# Altium PCB CAN_SNIFFER.PcbDoc
Units mm, origin at the board's own origin, x right, y up, seen from the top; angles counter-clockwise.
Board outline 51.88 x 31.88 mm, 2 copper layers (Top Layer, Bottom Layer), stack 0.9 mm thick; 56 components, 61 nets, 266 pads, 172 vias.
Unrouted connection lines stored in the file: 1.
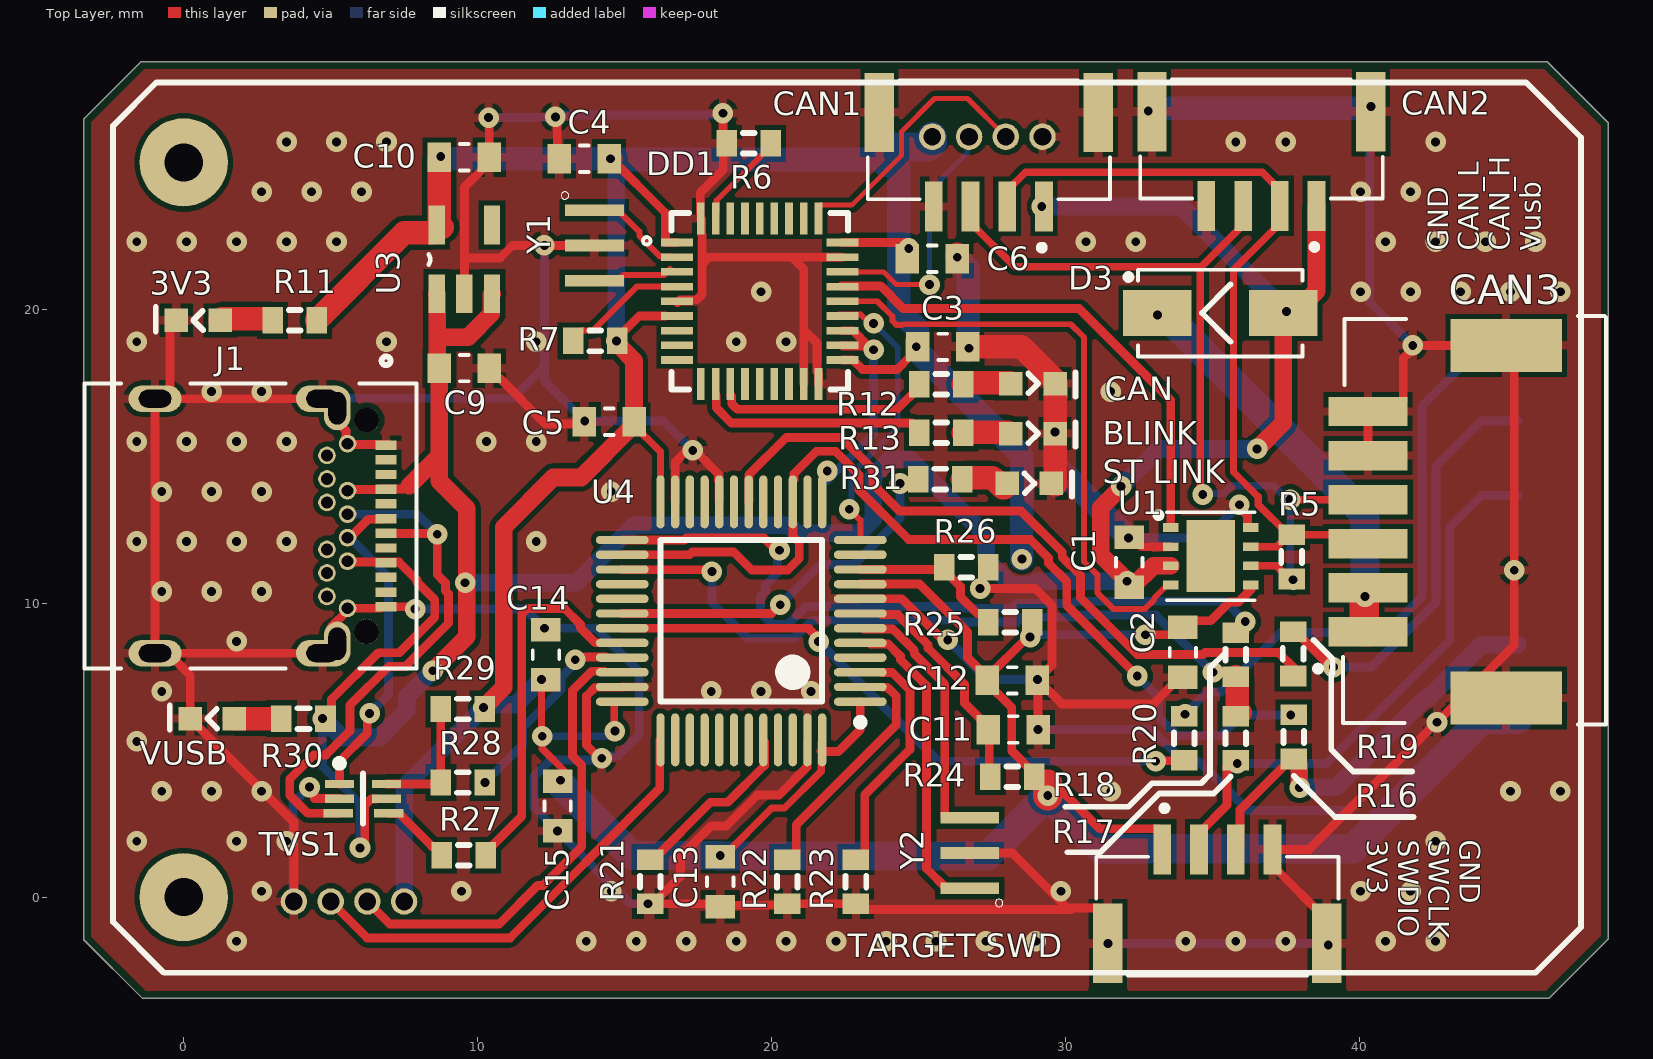
[diagram p0: Top Layer view]
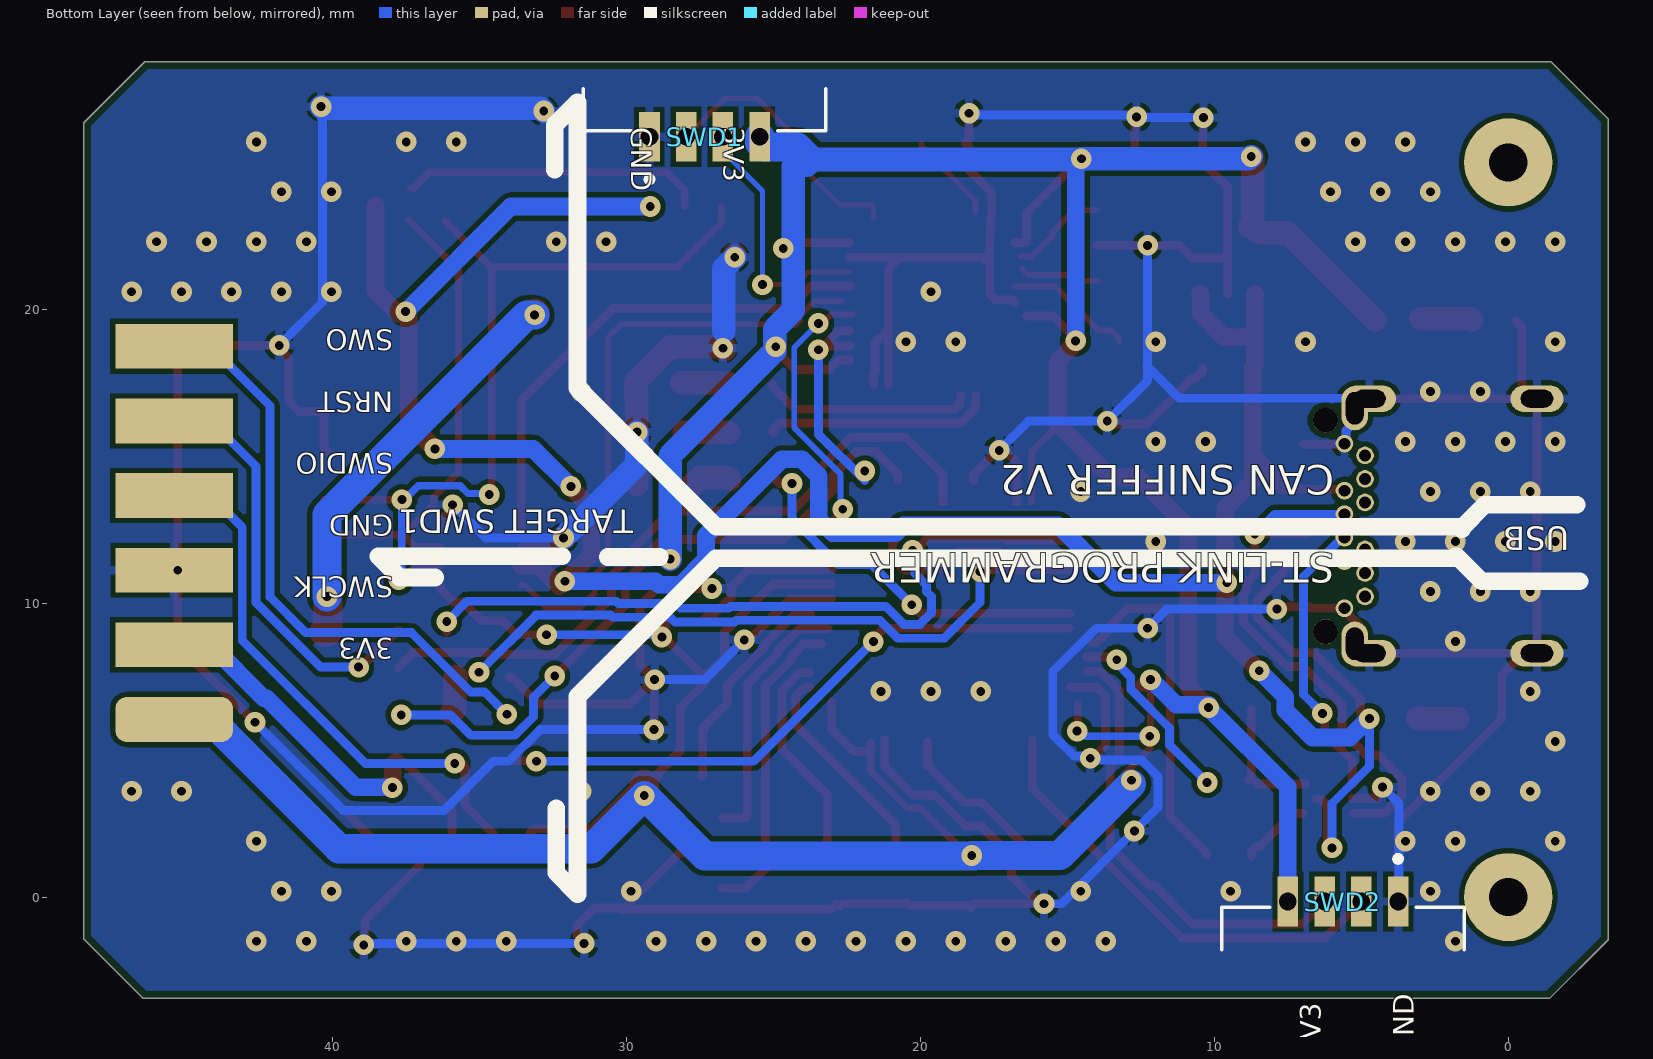
[diagram p1: Bottom Layer view, seen from below]
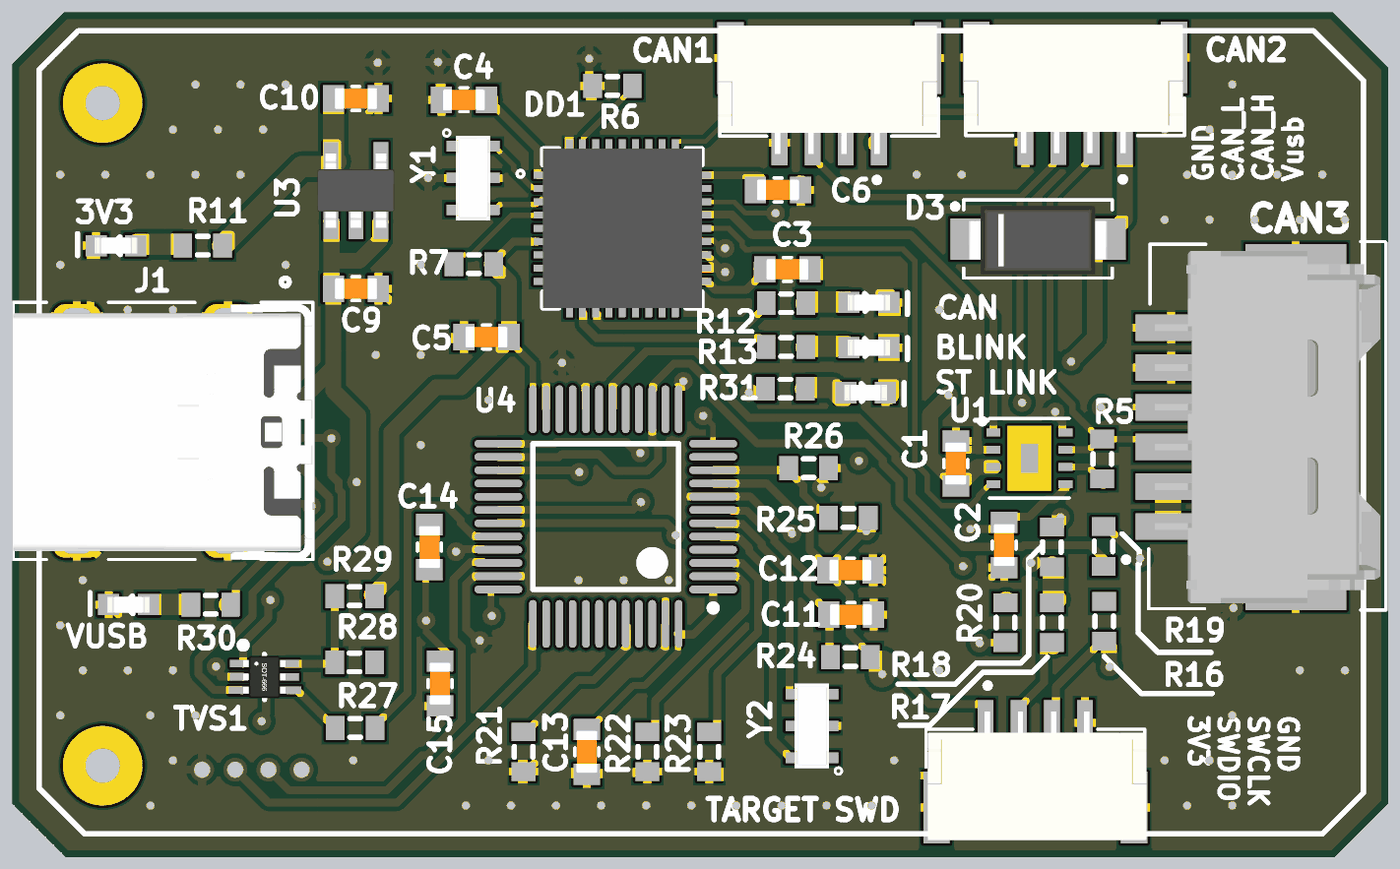
[diagram p2: 3D render of the assembled board from above, using the file's embedded part models]

## Layer stack, top to bottom
Top Solder: solder mask 0.0102, Solder Resist, Dk 3.5
Top Layer: signal copper 0.05
Dielectric 1: dielectric 0.8, FR-4, Dk 4.8
Bottom Layer: signal copper 0.05
Bottom Solder: solder mask 0.0102, Solder Resist, Dk 3.5

## Board outline
-3.4,-1.45 -3.4,26.475 -1.45,28.425 46.4,28.425 48.475,26.35 48.475,-1.425 46.45,-3.45 -1.4,-3.45

## Design rules (kind name [scope] priority, off if disabled: settings)
BoardOutlineClearance [All] p1: gap=0.25 ignorepadtopadclearanceinfootprint=FALSE
Clearance [All] p1: gap=0.17 ignorepadtopadclearanceinfootprint=FALSE
ComponentClearance [All] p1: gap=0.254 collisioncheckmode=3 verticalgap=2540 showdistances=FALSE
FanoutControl Fanout_SOIC [IsSOIC] p3: bgadir=Out bgaviamode=Closest fanoutstyle=Auto fanoutdirection=Alternating viagrid=0.025 // Fanout_SOIC (Default Rule)
FanoutControl Fanout_Small [(CompPinCount < 5)] p4: bgadir=Out bgaviamode=Closest fanoutstyle=Auto fanoutdirection=OutThenIn viagrid=0.025 // Fanout_Small (Default Rule)
FanoutControl Fanout_Default [All] p5: bgadir=In bgaviamode=Closest fanoutstyle=Auto fanoutdirection=Alternating viagrid=0.025 // Fanout_Default (Default Rule)
HoleSize [All] p1: absolutevalues=TRUE maxlimit=4.5 minlimit=0.3 maxpercent=80.000 minpercent=20.000
HoleToHoleClearance [All] p1: gap=0.4 allowstackedmicrovias=TRUE
MinimumSolderMaskSliver [All] p1: minsoldermaskwidth=0.15
PlaneClearance [All] p1: clearance=0.2
PlaneConnect [All] p1: planeconnectstyle=Relief reliefexpansion=0.5 reliefentries=4 reliefconductorwidth=0.2 reliefairgap=0.25
PolygonConnect PolygonConnect_1 [InNet('GND') vs IsStitchingVia and InNet('GND')] p1: connectstyle=Direct reliefconductorwidth=0.254 reliefentries=4 polygonreliefangle="90 Angle" airgapwidth=0.254
PolygonConnect [All] p2: connectstyle=Relief reliefconductorwidth=0.3 reliefentries=4 polygonreliefangle="90 Angle" airgapwidth=0.16
RoutingCorners [All] p1: cornerstyle=45-Degree minsetback=2.5 maxsetback=2.5
RoutingPriority [All] p1 off: routingpriority=0
RoutingVias [All] p1: holewidth=0.3 width=0.7 viastyle="Through Hole" minholewidth=0.3 minwidth=0.7 maxholewidth=0.8 maxwidth=1.2
SilkToSilkClearance [All] p1: silktosilkclearance=0
SilkToSolderMaskClearance [IsPad] p1: minsilkscreentomaskgap=0 clearancetoexposedcopper=TRUE
SolderMaskExpansion [All] p1: expansion=0.1 istentingtop=FALSE
Width [All] p1: maxlimit=5 minlimit=0.17 preferedwidth=0.3
17 further rules are at their usual default settings.

## Classes and differential pairs
component class STLINKv2DIY: C11 C12 C13 C14 C15 iC iD R16 R17 R18 R19 R20 R21 R22 R23 R24 R25 R26 R27 R28 R29 R30 R31 Rx "ST LINK" SWD2 "TARGET SWD" "TARGET SWD1" TVS1 Tx U4 VUSB Y2
component class CAN_SNIFFER: 3V3 BLINK C1 C2 C3 C4 C5 C6 C9 C10 CAN CAN1 CAN2 CAN3 D3 DD1 J1 R5 R6 R7 R11 R12 R13 SWD1 U1 U3 Y1

## Components (designator, comment, footprint, x,y, rotation, side; value= is the part's Value field where it differs from the comment)
3V3 "0603-LED-RED" *LEDM1608X80_LTE-C1906R-14(Primary) 0.5,19.625 r0 top value=RED
BLINK "0603-LED-GREEN" *LEDM1608X80_LTE-C1906R-14(Primary) 28.9,15.775 r180 top value=GREEN
C1 "GX035C104MAT2-500" *CAPC1608X90 32.175,11.4 r90 top value=0.1u
C2 "GX035C104MAT2-500" *CAPC1608X90 34,8.325 r270 top value=0.1u
C3 "GX035C104MAT2-500" *CAPC1608X90 25.825,18.725 r0 top value=0.1u
C4 "GX035C104MAT2-500" *CAPC1608X90 13.625,25.125 r180 top value=0.1u
C5 "GX035C104MAT2-500" *CAPC1608X90 14.475,16.175 r180 top value=0.1u
C6 "GX035C104MAT2-500" *CAPC1608X90 25.475,21.725 r0 top value=0.1u
C9 "GX035C104MAT2-500" *CAPC1608X90 9.55,18 r0 top value=0.1u
C10 "GX035C104MAT2-500" *CAPC1608X90 9.55,25.175 r0 top value=0.1u
C11 "GX035C104MAT2-500" *CAPC1608X90 28.225,5.7 r0 top value=0.1u
C12 "GX035C104MAT2-500" *CAPC1608X90 28.2,7.375 r0 top value=0.1u
C13 "GX035C104MAT2-500" *CAPC1608X90 18.258,0.525 r270 top value=0.1u
C14 "GX035C104MAT2-500" *CAPC1608X90 12.325,8.25 r90 top value=0.1u
C15 "GX035C104MAT2-500" *CAPC1608X90 12.725,3.1 r270 top value=0.1u
CAN "0603-LED-BLUE" *LEDM1608X80_LTE-C1906R-14(Primary) 28.9,17.475 r180 top value=BLUE
CAN1 "SM04B-GHS-TB(LF)(SN)-" JST_SM04B-GHS-TB(LF)(SN)- 27.4,25.775 r180 top
CAN2 "SM04B-GHS-TB(LF)(SN)-" JST_SM04B-GHS-TB(LF)(SN)- 36.675,25.8 r180 top
CAN3 "502585-0670" MOLEX_502585-0670 40.5,12.775 r90 top
D3 "SS16" *DIOM5227X250N_SS16(Primary) 35.275,19.875 r0 top
DD1 "STM32F103T8" *QFN50P600X600X100-37N 19.6,20.275 r0 top
J1 "UJ31-CH-31N-SMT-TR" CUI_UJ31-CH-31N-SMT-TR 6.885,15.38 r270 top
R5 "RC0603FR-07120RL" J1-0603 37.7,11.575 r90 top value=120
R6 "RC0603FR-0710KL" J1-0603 19.225,25.65 r0 top value=10k
R7 "RC0603FR-0710KL" J1-0603 14,18.925 r180 top value=10k
R11 "RC0603FR-101KL" J1-0603 3.775,19.625 r180 top value=1k
R12 "RC0603FR-101KL" J1-0603 25.775,17.45 r0 top value=1k
R13 "RC0603FR-101KL" J1-0603 25.775,15.8 r0 top value=1k
R16 "RC0603FR-0722RL" J1-0603 37.775,5.45 r90 top value=22
R17 "RC0603FR-0722RL" J1-0603 35.8,5.4 r90 top value=22
R18 "RC0603FR-07100RL" J1-0603 35.8,8.25 r90 top value=100
R19 "RC0603FR-0722RL" J1-0603 37.75,8.275 r270 top value=22
R20 "RC0603FR-0722RL" J1-0603 34.05,5.4 r270 top value=22
R21 "RC0603FR-0710KL" J1-0603 15.875,0.525 r270 top value=10k
R22 "RC0603FR-0710KL" J1-0603 20.542,0.525 r270 top value=10k
R23 "RC0603FR-0710KL" J1-0603 22.875,0.525 r270 top value=10k
R24 "RC0603FR-0710KL" J1-0603 28.2,4.1 r0 top value=10k
R25 "RC0603FR-0710KL" J1-0603 28.125,9.35 r0 top value=10k
R26 "RC0603FR-0710KL" J1-0603 26.625,11.225 r180 top value=10k
R27 "RC0603FR-0722RL" J1-0603 9.525,1.425 r0 top value=22
R28 "RC0603FR-0722RL" J1-0603 9.5,3.9 r0 top value=22
R29 "RC0603FR-071K5L" J1-0603 9.5,6.4 r0 top value=1.5k
R30 "RC0603FR-101KL" J1-0603 4.075,6.075 r180 top value=1k
R31 "RC0603FR-101KL" J1-0603 25.75,14.225 r0 top value=1k
"ST LINK" "0603-LED-BLUE" *LEDM1608X80_LTE-C1906R-14(Primary) 28.775,14.075 r180 top value=BLUE
SWD1 "SM04B-GHS-TB(LF)(SN)-" JST_BM04B-GHS-holes 27.35,29.225 r0 bottom
SWD2 "SM04B-GHS-TB(LF)(SN)-" JST_BM04B-GHS-holes 5.625,-3.5 r180 bottom
"TARGET SWD" "SM04B-GHS-TB(LF)(SN)-" JST_SM04B-GHS-TB(LF)(SN)- 35.175,-0.65 r0 top
"TARGET SWD1" "PLS-6" "HDR Side 6 pin" 45.4,8.585 r90 bottom
TVS1 "USBLC6-2P6" SOT23127P600-8N 6.1,3.35 r0 top
U1 "TJA1042TK/3" SOT782-1 34.95,11.6 r270 top
U3 "SPX3819M5-L-3-3/TR" *SOT95P280X145-5N 9.55,21.7 r90 top value=3V3
U4 "STM32F103CBT6" STM-LQFP48_N 18.975,9.4 r180 top
VUSB "0603-LED-ORANGE" *LEDM1608X80_LTE-C1906R-14(Primary) 0.975,6.075 r0 top value=ORANGE
Y1 "CSTCE8M00G55-R0" *OSC_CSTCE8M00G55-R0 13.975,22.175 r270 top
Y2 "CSTCE8M00G55-R0" *OSC_CSTCE8M00G55-R0 26.75,1.5 r90 top

## Footprints (in the part's own frame and the unit in brackets; to place one, negate y for a bottom-side part, rotate by r counter-clockwise, add the part's x,y. Pads: shape width x height; smd on the part's side, far side on the other; paste and mask are expansions set on the pad)
*CAPC1608X90 [mm]
  rect 0.8x1 smd: 1(-0.85,0) 2(0.85,0)
  silkscreen extent -0.15,-0.45 0.15,0.45, body extent -0.8,-0.4 0.8,0.41, height 0.88
*DIOM5227X250N_SS16(Primary) [mm]
  rect 2.33x1.56 smd: A(2.14,0) C(-2.14,0)
  silkscreen extent -3.22,-1.48 2.8,1.48, body extent -2.61,-1.35 2.61,1.25, height 2.2
*LEDM1608X80_LTE-C1906R-14(Primary) [mm]
  rect 0.8x0.8 smd: A(0.75,0) C(-0.75,0)
  silkscreen extent -1.45,-0.38 0.16,0.45, body extent -0.8,-0.3 0.8,0.3, height 1.15
*OSC_CSTCE8M00G55-R0 [mm]
  rect 0.4x2 smd: 1(-1.2,0) 2(0,0) 3(1.2,0)
  silkscreen extent -1.83,-1.13 -1.57,-0.87, body extent -1.6,-0.65 1.6,0.65, height 1
*QFN50P600X600X100-37N [mm]
  rect 1.08x0.26 smd: 1(-2.815,2) 2(-2.815,1.5) 3(-2.815,1) 4(-2.815,0.5) 5(-2.815,0) 6(-2.815,-0.5) 7(-2.815,-1) 8(-2.815,-1.5) 9(-2.815,-2) 19(2.815,-2) 20(2.815,-1.5) 21(2.815,-1) 22(2.815,-0.5) 23(2.815,0) 24(2.815,0.5) 25(2.815,1) 26(2.815,1.5) 27(2.815,2)
  rect 0.26x1.08 smd: 10(-2,-2.815) 11(-1.5,-2.815) 12(-1,-2.815) 13(-0.5,-2.815) 14(0,-2.815) 15(0.5,-2.815) 16(1,-2.815) 17(1.5,-2.815) 18(2,-2.815) 28(2,2.815) 29(1.5,2.815) 30(1,2.815) 31(0.5,2.815) 32(0,2.815) 33(-0.5,2.815) 34(-1,2.815) 35(-1.5,2.815) 36(-2,2.815)
  silkscreen extent -3.97,-3 3,3, body extent -3,-3 3,3, height 1
*SOT95P280X145-5N [mil]
  rect 52x22 smd: 1(-46,37) 2(-46,0) 3(-46,-37) 4(46,-37) 5(46,37)
  silkscreen extent -7,46 7,48, body extent -55,-57 55,57, height 57
CUI_UJ31-CH-31N-SMT-TR [mm]
  rect 0.32x0.7 smd: A1(0,0) A2(0.5,0) A3(1,0) A4(1.5,0) A5(2,0) A6(2.5,0) A7(3,0) A8(3.5,0) A9(4,0) A10(4.5,0) A11(5,0) A12(5.5,0)
  round 0.6 hole 0.4: B1(5.55,-1.31) B2(5.15,-2.01) B3(4.35,-2.01) B4(3.95,-1.31) B5(3.55,-2.01) B6(3.15,-1.31) B7(2.35,-1.31) B8(1.95,-2.01) B9(1.55,-1.31) B10(1.15,-2.01) B11(0.35,-2.01) B12(-0.05,-1.31)
  oval 1.5x0.9 hole 0.6 slot 1.1 at 0 deg: SH1(-1.255,-1.66) SH2(6.755,-1.66)
  oval 0.9x1.8 hole 0.6 slot 1.1 at 90 deg: SH3(-1.58,-2.16) SH4(7.08,-2.16) SH5(-1.58,-7.86) SH6(7.08,-7.86)
  round 0.85 hole 0.85 unplated: ""(-0.85,-0.66) ""(6.35,-0.66)
  silkscreen extent -3.02,-10.26 7.6,1.04, body extent -2.06,-10.26 7.64,1.04, height 3.17
"HDR Side 6 pin" [mm]
  rrect50% 1.524x4 smd: 1(-2.54,0)
  rect 1.524x4 smd: 2(0,0) 3(2.54,0) 4(5.08,0) 5(7.62,0) 6(10.16,0)
J1-0603 [mm] "Chip Resistor, Body 1.6x0.8mm, IPC High Density"
  rect 0.7x0.9 smd: 1(-0.75,0) 2(0.75,0)
  silkscreen extent -0.2,-0.35 0.2,0.35, body extent -0.85,-0.48 0.85,0.48, height 0.9
JST_BM04B-GHS-holes [mm]
  rect 0.7x1.7 / inner rect 0.6x1.7 / far side round 0.9 hole 0.6 mask+0.1: 1(1.875,3.35) 2(0.625,3.35) 3(-0.625,3.35) 4(-1.875,3.35)
  silkscreen extent -4.13,1.72 4.13,4.9
JST_SM04B-GHS-TB(LF)(SN)- [mm]
  rect 0.6x1.7 smd: 1(-1.875,2.275) 2(-0.625,2.275) 3(0.625,2.275) 4(1.875,2.275)
  rect 1x2.7 smd: SH1(-3.725,-0.925) SH2(3.725,-0.925)
  silkscreen extent -4.13,-2.02 4.13,3.77, body extent -4.06,-2.16 4.19,2.69, height 4.35
MOLEX_502585-0670 [mm]
  rect 1x2.7 smd: 1(-3.75,0.2) 2(-2.25,0.2) 3(-0.75,0.2) 4(0.75,0.2) 5(2.25,0.2) 6(3.75,0.2)
  rect 1.8x3.8 smd: P1(-6,-4.5) P2(6,-4.5)
  silkscreen extent -6.9,-7.9 7,2, body extent -6.65,-7.68 6.65,0.82, height 6.41
SOT782-1 [mm]
  rect 0.3x0.525 smd: 1(-0.975,-1.362) 2(-0.325,-1.362) 3(0.325,-1.362) 4(0.975,-1.362) 5(0.975,1.363) 6(0.325,1.363) 7(-0.325,1.363) 8(-0.975,1.363)
  rect 2.45x1.65 smd paste-2: P$9(0,0)
  silkscreen extent -1.5,-1.88 1.5,1.5, body extent -1.52,-1.52 1.52,1.52, height 0.85
SOT23127P600-8N [mm]
  rect 1x0.284 smd: 1(-0.8,0.5) 2(-0.8,0) 3(-0.843,-0.502) 4(0.884,-0.502) 5(0.8,0) 6(0.8,0.5)
  silkscreen extent -0.92,-0.85 0,1.32, body extent -0.8,-0.8 0.8,0.8, height 0.6
STM-LQFP48_N [mm] "QFP, 48-Leads, Body 7x7mm, Pitch 0.5mm, IPC Medium Density"
  oval 1.8x0.284 smd: 1(-4.05,2.75) 2(-4.05,2.25) 3(-4.05,1.75) 4(-4.05,1.25) 5(-4.05,0.75) 6(-4.05,0.25) 7(-4.05,-0.25) 8(-4.05,-0.75) 9(-4.05,-1.25) 10(-4.05,-1.75) 11(-4.05,-2.25) 12(-4.05,-2.75) 25(4.05,-2.75) 26(4.05,-2.25) 27(4.05,-1.75) 28(4.05,-1.25) 29(4.05,-0.75) 30(4.05,-0.25) 31(4.05,0.25) 32(4.05,0.75) 33(4.05,1.25) 34(4.05,1.75) 35(4.05,2.25) 36(4.05,2.75)
  oval 0.284x1.8 smd: 13(-2.75,-4.05) 14(-2.25,-4.05) 15(-1.75,-4.05) 16(-1.25,-4.05) 17(-0.75,-4.05) 18(-0.25,-4.05) 19(0.25,-4.05) 20(0.75,-4.05) 21(1.25,-4.05) 22(1.75,-4.05) 23(2.25,-4.05) 24(2.75,-4.05) 37(2.75,4.05) 38(2.25,4.05) 39(1.75,4.05) 40(1.25,4.05) 41(0.75,4.05) 42(0.25,4.05) 43(-0.25,4.05) 44(-0.75,4.05) 45(-1.25,4.05) 46(-1.75,4.05) 47(-2.25,4.05) 48(-2.75,4.05)
  silkscreen extent -4.18,-2.75 2.75,3.57, body extent -3.5,-3.5 3.5,3.5, height 1.6

## Part data
3V3: "Red 620nm LED Indication - Discrete 2.2V 0603 (1608 Metric)", Package="0603 Lite-On", MP=LTST-C194KRKT, SnapEDA_Link=https://www.snapeda.com/parts/LTE-C1906R-14/Lite-On%20Inc./view-part/?ref=snap, Type=SMD
BLINK: "Green 571nm LED Indication - Discrete 2V 0603 (1608 Metric)", Package="0603 Lite-On", MP=LTST-C191KGKT, SnapEDA_Link=https://www.snapeda.com/parts/LTST-C190KGKT/Lite-On%20Inc./view-part/?ref=search&t=0603%20LED%20GREEN, Type=SMD
C1 C2 C3 C4 C5 C6 C9 C10 C11 C12 C13 C14 C15: "Cap Thin Film 0.1uf 50v 0603", Package="0603 AVX", MF=AVX, MP=CL10B104JB8NNNC, Pacage Metric=1608, SnapEDA_Link=https://www.snapeda.com/parts/GX035C104MAT2-500/AVX/view-part/?ref=snap, Type=SMD
CAN "ST LINK": "LED IrLED Chip LED 2-Pin SMD T/R", Package="0603 Lite-On", MP=LTST-S270TBKT, SnapEDA_Link=https://www.snapeda.com/parts/LTE-C1906R-14/Lite-On%20Inc./view-part/?ref=snap, Type=SMD
CAN1 CAN2 "TARGET SWD": "Connector Header Surface Mount, Right Angle 4 position 0.049 _1.25mm_", Package=None, ChipDip_Link=https://www.chipdip.ru/product/sm04b-ghs-tb-lf-sn-gh-1.25mm-header-side-ent, HelpURL=http://www.farnell.com/datasheets/2082975.pdf, MF="JST Sales", MP=SM04B-GHS-TB(LF)(SN), SnapEDA_Link=https://www.snapeda.com/parts/SM04B-GHS-TB%28LF%29%28SN%29-/JST%20Sales%20America%20Inc./view-part/2759740/?ref=snap, System=Connector
CAN3: "1.50mm Pitch, CLIK-Mate PCB Receptacle, Single Row, Surface Mount, Right-Angle, Tin Plating, Positive Lock, 6 Circuits, Natural", Package=None, MF=Molex, MP=502585-0670, SnapEDA_Link=https://www.snapeda.com/parts/502494-0670/Molex/view-part/?ref=snap, System=Connector, Type=SMD
D3: "Diode Schottky 60V 1A Surface Mount SMA", Package=SMA-2, ChipDip_Link=https://www.chipdip.ru/product/ss16, Instructions=DNP, MP=SS16, SnapEDA_Link=https://www.snapeda.com/parts/SS16/ON%20Semiconductor/view-part/?ref=search&t=ss16, Type=SMD
DD1: "STM32F103T8U6, Микроконтроллер 32BIT ARM 64K FLASH [VFQFPN-36]", Package=VFQFPN-36, ChipDip_Link=https://www.chipdip.ru/product/stm32f103t8u6-2, HelpURL=http://www.st.com/stonline/products/literature/ds/13587.pdf, MF=STM, MP=STM32F103T8U6, SnapEDA_Link=https://www.snapeda.com/parts/STM32F103T8U6TR/STMicroelectronics/view-part/?ref=search&t=STM32F103T8U6, Type=SMD
J1: "Type C, USB 3.1 Gen 2, 5 A, Right Angle, Surface Mount _SMT_, USB Receptacle", Package=None, ChipDip_Link=https://www.chipdip.ru/product1/8002862225, HelpURL=https://www.chipdip.ru/product1/8002862225, MF="CUI Devices", MP=UJ31-CH-31N-SMT-TR, SnapEDA_Link=https://www.snapeda.com/parts/UJ31-CH-31N-SMT-TR/CUI%20Devices/view-part/2776725/?ref=snap, System=Connector, Type=SMT
R5: "120 Ohms 1 0.1 W 1 10 W Chip Resistor 0603 1608 Metric Thick Film", Package=R0603, ChipDip_Link=https://www.chipdip.ru/product0/9000079618, HelpURL=https://www.chipdip.ru/product0/9000079618, MF="Yageo or NXP", MP=RC0603FR-07120RL, Pacage Metric=1608, SnapEDA_Link=https://www.snapeda.com/parts/RC0603FR-07120RL/Yageo/view-part/?ref=search&t=RC0603FR-07120RL, Type=SMD
R6 R7 R21 R22 R23 R24 R25 R26: "10 kOhms 1 0.1 W 1 10 W Chip Resistor 0603 1608 Metric Thick Film", Package=R0603, ChipDip_Link=https://www.chipdip.ru/product0/9000079736, HelpURL=https://www.chipdip.ru/product0/9000079736, MF="Yageo or NXP", MP="10K 1% 0603", Pacage Metric=1608, SnapEDA_Link=https://www.snapeda.com/parts/RC0603FR-0710KL/Yageo/view-part/?ref=dk&t=RC0603FR-0710KL&con_ref=None, Type=SMD
R11 R12 R13 R30 R31: "1 kOhms ±1% 0.1W, 1/10W Chip Resistor 0603 (1608 Metric) Moisture Resistant Thick Film", Package=R0603, MF="Yageo or NXP", MP=RC0603FR-101KL, Pacage Metric=1608, SnapEDA_Link=https://www.snapeda.com/parts/RC0603FR-101KL/Yageo/view-part/?ref=search&t=RC0603FR-07%201k, Type=SMD
R16 R17 R19 R20 R27 R28: "22 Ohms ±1% 0.1W, 1/10W Chip Resistor 0603 (1608 Metric) Moisture Resistant Thick Film", Package=R0603, MF="Yageo or NXP", MP=RC0603FR-0722RL, Pacage Metric=1608, SnapEDA_Link=https://www.snapeda.com/parts/RC0603FR-0722RL/Mepco%20Philips/view-part/?ref=search&t=RC0603FR-0722RL, Type=SMD
R18: "100 Ohms ±1% 0.1W, 1/10W Chip Resistor 0603 (1608 Metric) Thick Film", Package=R0603, MF="Yageo or NXP", MP=RC0603FR-07100RL, Pacage Metric=1608, SnapEDA_Link=https://www.snapeda.com/parts/RC0603FR-07100RL/Yageo/view-part/?ref=search&t=RC0603FR-07100RL, Type=SMD
R29: "1.5 kOhms ±1% 0.1W, 1/10W Chip Resistor 0603 (1608 Metric) Thick Film", Package=R0603, MF="Yageo or NXP", MP=RC0603FR-071K5L, Pacage Metric=1608, SnapEDA_Link=https://www.snapeda.com/parts/RC0603FR-071K5L/Yageo/view-part/?ref=search&t=RC0603FR-07%201k, Type=SMD
SWD1 SWD2: library part "SWD SM04B-GHS-TB(LF)(SN)-", "Conn Shrouded Header HDR 4 POS 1.25mm Solder ST SMD Reel", Package=None, Instructions=DNP, MF="JST Sales", MP=SM04B-GHS-TB(LF)(SN), SnapEDA_Link=https://www.snapeda.com/parts/BM04B-GHS-TBT%28LF%29%28SN%29%28N%29/JST%20Sales%20America%20Inc./view-part/?ref=snap, System=Connector, Type=SMD
"TARGET SWD1": "PLS-6 (DS1021-1x6), Вилка штыревая 2.54мм 1x6 прямая тип1", ChipDip_Link=https://www.chipdip.ru/product/pls-6, Instructions=DNP, MP=PLS-6, System=Connector, Type=SMD
TVS1: "17V Clamp 5A (8/20µs) Ipp Tvs Diode Surface Mount SOT-666", Package=SOT-666, ChipDip_Link=https://www.chipdip.ru/product/usblc6-2p6-2, HelpURL=https://static.chipdip.ru/lib/093/DOC001093117.pdf, MF=STM, MP=USBLC6-2P6, SnapEDA_Link=https://www.snapeda.com/parts/USBLC6-2P6/STMicroelectronics/view-part/?ref=search&t=USBLC6-2P6, Type=SMD
U1: library part TJA1042, "1/1 Transceiver Half CANbus 8-SO", Package="VDFN-8 NXP USA", ChipDip_Link=https://www.chipdip.ru/product1/8002840332, HelpURL=https://static.chipdip.ru/lib/583/DOC001583059.pdf, MF="NXP USA", MP=TJA1042TK/3, SnapEDA_Link=https://www.snapeda.com/parts/TJA1042/NXP%20USA%20Inc./view-part/900919/?ref=snap, Type=SMD
U3: "Low Dropout Voltage Regulator, Adjustable 0.5A, В±1%, 2.5 to 16 Vin, 5-Pin SOT-23", Package="SOT-23-5 Exar", ChipDip_Link=https://www.chipdip.ru/product1/8003455237, HelpURL=http://www.farnell.com/datasheets/2614478.pdf, MF="MaxLinear, Inc.", MP=SPX3819M5-L-3-3/TR, SnapEDA_Link=https://www.snapeda.com/parts/SPX3819M5-L/MaxLinear%2C%20Inc./view-part/?ref=snap, Type=SMD
U4: "ARM® Cortex®-M3 STM32F1 Microcontroller IC 32-Bit 72MHz 128KB (128K x 8) FLASH", Package=LQFP-48, ChipDip_Link=https://www.chipdip.ru/product/stm32f103cbt6, HelpURL=https://static.chipdip.ru/lib/235/DOC000235733.pdf, Instructions="STM32F103CBT6 - should be B letter not 8", MF=STM, MP=STM32F103CBT6, SnapEDA_Link=https://www.snapeda.com/parts/STM32F103CBT6/STMicroelectronics/view-part/?ref=search&t=STM32F103CBT6, Type=SMD
VUSB: "Orange 605nm LED Indication - Discrete 2.2V 0603 (1608 Metric)", Package="0603 Lite-On", MP=LTST-C194KFKT, SnapEDA_Link=https://www.snapeda.com/parts/SML-D12D1WT86/Rohm/view-part/?ref=search&t=0603%20LED%20orange, Type=SMD
Y1 Y2: "Ceramic Resonator 8MHz ??0.5% _Tol_ ??0.2% _Stability_ 33pF 40Ohm 3-Pin CSMD T/R", Package="SMD-3 Murata", ChipDip_Link=https://www.chipdip.ru/product1/8001783721, HelpURL=https://www.murata.com/en-eu/api/pdfdownloadapi?cate=&partno=CSTCE8M00G55-R0, MF=Murata, MP=CSTCE8M00G55-R0, SnapEDA_Link=https://www.snapeda.com/parts/CSTCE8M00G55-R0/Murata%20Electronics%20North%20America/view-part/?ref=snap, Type=SMD

## Free pads (board coordinates)
  round 3 hole 1.3: ""(0,0) ""(0,25)

## Via types
v1: diameter 0.7, hole 0.3, Top Layer to Bottom Layer, tented both sides, 172 vias

## Nets (pads, with @x,y where several pads share a name; then routed paths per layer and width w, separated by ;. In a path a pad name is that pad's centre, name@x,y a point inside that pad or via, vN(x,y) a via of type N, cw(c..) or ccw(c..) an arc to the next point about the centre after c; other vN are vias at no path point)
3.3: "TARGET SWD1.1" "TARGET SWD.1" C2.1 C3.1 C4.1 C5.1 C6.1 C10.1 C12.1 C13.1 C14.1 C15.1 DD1.1 DD1.6 DD1.19 DD1.27 R7.1 R11.1 R24.2 R25.2 R29.2 SWD1.4 SWD2.4 U1.5 U3.5 U4.1 U4.9 U4.24 U4.36 U4.48 | length 167.2
  Top Layer w0.25: v1@12.175,5.4 12.175,7.05 12.25,7.125 12.7,7.125 12.425,7.4 C14.1 v1(12.175,7.4) ; v1(12.2,5.475) 12.2,5.05 C15.1@13.025,4.225 ; U4.36@14.65,6.575 14.65,5.675 v1(14.675,5.65) ; C5.1@15.3,16.225 15.3,16.075 16.225,15.15 U4.24 ; v1(18.258,1.417) C13.1 18.358,1.375 20.014,3.031 20.446,3.031 21.7,4.284 21.7,4.962 U4.48@21.7,5.275
  Top Layer w0.3: C4.1@14.475,25.2 16.395,23.28 16.395,22.295 16.415,22.275 DD1.1 ; R7.1@14.75,18.825 R7.1 14.75,19.025 15.5,19.775 DD1.6@16.395,19.775 ; C5.1@15.325,16.275 15.375,16.225 C5.1@15.375,16.2 ; U4.48@21.687,4.975 21.7,4.962 21.712,4.95 22.275,4.95 23.025,5.7 U4.1 ; DD1.19 22.785,18.275 23.104,17.956 24.278,17.956 24.7,18.378 C3.1@24.7,18.95 ; DD1.27 v1@24.55,22.275 ; U4.9 25.048,10.65 26.667,9.03 26.667,8.158 27.225,7.6 C12.1@27.375,7.6 ; R25.2@28.775,9.375 28.675,9.275 28.675,8.8 27.35,7.475 C12.1 27.35,7.275 28.175,6.45 28.175,4.975 R24.2@28.95,4.2 ; R24.2 29.4,4.1 31.175,2.325 33.15,2.325 33.3,2.175 33.3,1.75 ; v1(32.725,8.925) 33.75,8.925 C2.1 34.228,9.403 34.95,9.403 35.593,10.045 35.898,10.045 36.325,10.472 U1.5@36.325,10.6
  Top Layer w0.6: v1(10.2,6.45) 10.885,7.135 10.885,12.585 12.58,14.28 13.53,14.28 15.25,16 C5.1@15.3,16 ; R7.1@14.725,18.875 14.725,18.85 14.75,18.825 15.325,18.25 15.325,16.275 C5.1 ; v1(14.725,18.925) R7.1
  Top Layer w0.8: R11.1 7.508,22.608 U3.5@8.49,22.608 ; C10.1 8.7,22.9 U3.5@8.8,22.8 ; C4.1 v1(14.525,25.125)
  Top Layer w1: v1(29.4,3.455) 29.4,3.85
  Bottom Layer w0.25: v1(12.2,5.475) 14.378,5.475 14.553,5.65 v1(14.675,5.65) ; v1@12.825,3.85 v1(12.825,3.975)
  Bottom Layer w0.3: v1(28.801,8.85) 28.876,8.925 v1(32.725,8.925)
  Bottom Layer w0.6: SWD2.4 7.5,3.75 v1(10.2,6.45) ; v1@10.2,6.55 11.298,6.55 12.148,7.4 v1(12.175,7.4) ; v1@14.55,25.075 14.725,24.9 v1(14.725,18.925)
  Bottom Layer w0.8: v1(8.75,25.2) 8.825,25.125 v1(14.525,25.125) ; v1@14.55,25.1 23.675,25.1 23.875,24.9 24.275,24.9 24.325,24.85 24.325,22.075 24.325,19.976 24.97,19.331 24.97,18.58 28.525,15.025 v1(28.525,11.5)
  Bottom Layer w1: v1@12.825,3.85 15.258,1.417 v1(18.258,1.417) ; v1@18.175,1.4 27.345,1.4 v1(29.4,3.455) 31.205,1.65 39.792,1.65 43.67,5.528 43.67,5.553 44.162,6.045 45.4,6.045 ; 23.775,25.1 24.2,25.525 25.325,25.525 25.475,25.675 SWD1.4
  other v1: 24.925,18.725 24.675,22.075
ADC_5V: DD1.8
BOOT0: DD1.35 R6.2 | length 3.1
  Top Layer w0.2: DD1.35@18.125,23.3 18.13,23.305 18.13,23.705 19.975,25.55 R6.2
CAN_H: CAN1.2 CAN2.2 CAN3.3 R5.2 U1.7 | length 26.5
  Top Layer w0.25: CAN1.2 28.025,24.05 28.645,24.67 36.705,24.67 37.25,24.125 CAN2.2@37.35,24.125 ; U1.7 37.2,11.925 R5.2@37.475,12.2 ; CAN2.2@37.4,23.025 35.725,21.35 35.725,14.465 36.572,13.618 36.572,13.353 37.55,12.375 R5.2@37.575,12.375 ; R5.2@37.725,12.225 37.825,12.325 40,12.325 CAN3.3
CAN_L: CAN1.3 CAN2.3 CAN3.4 R5.1 U1.6 | length 29.2
  Top Layer w0.25: CAN1.3 26.775,22.95 28.275,21.45 34.625,21.45 ; 34.65,21.45 34.625,21.45 ; v1(34.675,13.7) 34.595,13.78 34.595,21.42 34.625,21.45 ; CAN2.3@36.175,23 34.625,21.45 ; U1.6 37.175,11.275 R5.1@37.675,10.775 ; v1(37.65,13.525) CAN3.4
  Bottom Layer w0.25: v1(34.675,13.7) 34.711,13.736 35.4,13.736 35.66,13.996 37.095,13.996 37.541,13.55 v1@37.575,13.55 ; v1(37.65,13.525) 37.65,10.9 v1(37.75,10.8)
CAN_RXD: DD1.23 U1.4 | length 20.6
  Top Layer w0.2: DD1.23@22.675,20.275 23.602,20.275 24.12,19.757 24.12,19.609 24.266,19.463 24.431,19.463 24.463,19.495 30.188,19.495 30.635,19.048 30.635,11.419 31.1,10.954 31.1,10.343 31.635,9.808 32.715,9.808 33.028,10.122 33.028,10.178 33.475,10.625 U1.4
CAN_TXD: DD1.24 U1.1 | length 17.2
  Top Layer w0.3: DD1.24@22.375,20.8 23.717,20.8 24.492,20.025 30.475,20.025 33.588,16.912 U1.1
D+: J1.A6 J1.B6 TVS1.1 | length 11.2
  Top Layer w0.3: TVS1.1 5.3,4.118 5.3,4.633 6.248,5.581 6.248,6.173 v1(6.325,6.25) ; J1.B6 5.652,12.23 6.282,12.86 J1.A6@6.8,12.86
  Bottom Layer w0.3: J1.B6@5.55,12.275 5.607,12.275 6.97,10.912 6.97,6.895 v1(6.325,6.25)
D-: J1.A7 J1.B7 TVS1.3 | length 18.9
  Top Layer w0.3: TVS1.3 5.249,2.855 4.22,2.855 3.61,3.465 3.61,4.02 4.426,4.836 4.839,4.836 5.655,5.652 5.655,6.528 6.975,7.848 7.535,7.848 9.015,9.328 9.015,10.312 8.905,10.422 8.905,10.7 8.625,10.98 8.625,12.225 v1@8.55,12.3 ; J1.A7@6.82,12.37 8.605,12.37 v1(8.625,12.35)
  Bottom Layer w0.3: J1.B7 7.945,13.03 v1(8.625,12.35)
GND: 3V3.C "ST LINK.C" "TARGET SWD1.3" "TARGET SWD.4" "TARGET SWD.SH1" "TARGET SWD.SH2" BLINK.C C1.2 C2.2 C3.2 C4.2 C5.2 C6.2 C9.2 C10.2 C11.2 C12.2 C13.2 C14.2 C15.2 CAN1.4 CAN1.SH1 CAN1.SH2 CAN2.4 CAN2.SH1 CAN2.SH2 CAN3.5 CAN3.6 CAN3.P1 CAN3.P2 CAN.C DD1.5 DD1.17 DD1.18 DD1.26 DD1.36 J1.A1 J1.A12 J1.B1 J1.B12 J1.SH1 J1.SH2 J1.SH3 J1.SH4 J1.SH5 J1.SH6 R6.1 R21.2 R22.2 R23.2 R26.1 SWD1.1 SWD2.1 TVS1.2 U1.2 U1.8 U3.2 U4.8 U4.20 U4.23 U4.35 U4.47 VUSB.C Y1.2 Y2.2 | length 279.1
  Top Layer w0.3: J1.SH6@-1.175,8.4 -1.152,8.4 -0.975,8.577 J1.SH5 4.49,16.96 J1.SH3@4.575,16.875 ; J1.SH6 4.575,8.3 J1.SH4@4.65,8.375 ; J1.SH5@-0.975,16.975 -0.725,16.975 -0.462,17.237 -0.462,19.412 3V3.C ; J1.SH6@-0.475,8.25 0.225,7.55 VUSB.C 3.75,2.55 SWD2.1 ; v1(4.28,3.743) 4.28,3.634 4.456,3.459 4.456,3.358 5.292,3.358 TVS1.2 ; J1.SH1@5.075,16.525 5.075,16.323 5.518,15.88 5.518,15.487 J1.B12 5.605,15.4 J1.A1@6.975,15.4 ; J1.SH2@5.2,8.55 5.053,8.55 5.026,8.577 5.026,9.2 5.575,9.749 J1.B1 6.705,9.83 J1.A12@6.775,9.9 ; J1.A12 7.687,9.88 7.767,9.8 v1(7.875,9.8) ; U3.2 9.55,21.75 ; C10.2@10.35,24.95 10.275,24.95 10.15,24.825 10.15,24.75 9.55,24.15 9.55,21.75 ; v1(10.375,26.525) 10.4,26.5 C10.2 ; C9.2 10.4,17.9 10.65,17.65 10.75,17.65 12.3,16.1 C5.2@13.75,16.1 ; v1@12.25,22.15 12.225,22.175 11.189,22.175 10.764,21.75 9.55,21.75 ; v1(12.275,22.175) Y1.2 ; v1(12.65,26.55) 12.712,26.487 12.712,25.213 C4.2@12.725,25.2 ; v1(14.226,4.725) 14.15,4.725 13.705,5.17 13.705,6.841 14.006,7.142 14.917,7.142 U4.35 ; v1(15.8,-0.225) 18.15,-0.225 C13.2@18.275,-0.35 ; R21.2@16.05,-0.1 16.1,-0.1 16.9,0.7 16.9,1.37 17.953,2.423 18.473,2.423 19.526,3.476 20.262,3.476 21.217,4.431 21.217,5.342 U4.47 ; U4.23 16.725,14.8 17.126,15.201 v1(17.324,15.201) 17.386,15.201 18.2,14.386 U4.20@18.2,14.175 ; DD1.5@16.8,20.225 16.9,20.325 17.458,20.325 17.645,20.512 17.645,22.538 17.62,22.563 17.62,23.07 DD1.36 ; DD1.36@17.575,23.275 17.575,23.963 18.363,24.75 18.363,25.538 R6.1 18.35,25.775 v1(18.35,26.675) ; 17.675,21.575 17.875,21.775 DD1.26 ; C13.2 18.308,-0.275 20.375,-0.275 R22.2@20.475,-0.175 ; R22.2 22.675,-0.225 R23.2@22.75,-0.3 ; 20.725,21.75 21.1,21.375 DD1.17 ; 21.125,19.275 21.555,18.845 21.555,17.875 21.6,17.83 DD1.18 ; R23.2 23.075,-0.425 30.2,-0.425 ; U4.8 24.431,10.15 25.828,8.753 v1(25.997,8.753) ; Y2.2 28.2,1.5 30.075,-0.375 31.1,-0.375 31.675,-0.95 31.675,-1.3 ; v1(27.101,10.501) 28.977,10.501 29.545,9.933 29.545,7.895 C12.2@29.125,7.475 ; v1(29.075,5.7) 29.075,7.375 C12.2@29.1,7.4 ; C12.2@29.125,7.325 29.875,6.575 33,6.575 33.9,7.475 C2.2 ; C1.2@32.3,12.225 32.6,11.925 U1.2 ; v1(35.927,13.351) 35.927,13.242 36.2,12.969 36.2,12.575 U1.8 ; v1@38.9,-1.45 38.9,-0.775 37.05,1.075 37.05,1.625 38.3,1.625 42.363,5.688 ; CAN3.5@40.15,15.125 40.3,15.275 CAN3.6 41.15,16.525 41.5,16.875 41.5,18.342 41.875,18.717 v1@41.875,18.775 ; v1@41.875,18.85 v1@41.875,18.775 ; v1(42.65,5.95) 45.275,8.575 v1(45.275,11.125) 45.275,18.925 CAN3.P2@45.325,18.975 ; CAN3.P2 v1@41.875,18.775
  Top Layer w0.8: v1(26.325,21.775) C6.2@26.325,21.875 ; C3.2@26.675,18.625 C3.2 28.506,18.725 29.65,17.581 CAN.C ; 29.65,14.025 BLINK.C v1(29.65,15.825) ; BLINK.C@29.65,15.875 29.65,17.075 ; 29.7,17.075 CAN.C@29.7,17.475
  Bottom Layer w0.3: SWD2.1@3.7,-0.1 3.714,-0.086 3.714,3.177 v1(4.28,3.743) ; J1.SH3 4.74,16.975 11.2,16.975 12.275,18.05 ; J1.SH1@5.225,16.575 5.225,16.173 5.518,15.88 5.518,15.487 J1.B12 ; v1(7.875,9.8) 11.625,9.8 v1(12.275,9.15) ; v1(10.375,26.525) v1@12.625,26.525 ; v1(12.275,22.175) 12.275,18.05 ; 12.3,18.075 12.275,18.05 ; v1@12.375,9.15 14.025,9.15 15.5,7.675 15.5,5.527 14.774,4.802 14.302,4.802 v1(14.226,4.725) 14.17,4.67 12.485,4.67 11.925,4.11 11.925,3.05 v1@12.675,2.3 ; v1(12.725,2.25) 15.2,-0.225 v1(15.8,-0.225) ; v1@12.725,26.722 12.835,26.612 18.287,26.612 v1(18.35,26.675) ; v1(13.65,16.2) 12.275,17.575 12.275,18.05 ; v1@13.675,16.25 13.725,16.2 16.325,16.2 v1(17.324,15.201) ; v1(25.997,8.753) 27.35,7.4 v1(29.05,7.4) ; v1(29.075,5.7) 32.948,5.7 34.023,4.625 34.536,4.625 36.211,2.95 39.65,2.95 v1(42.65,5.95) 42.675,5.975 v1@42.675,6.05 ; v1(31.45,-1.575) 38.9,-1.575 v1(38.95,-1.625) ; v1(32.15,12.225) 34.801,12.225 v1(35.927,13.351) ; v1@40.35,26.85 40.35,20.25 v1(41.825,18.775)
  Bottom Layer w0.8: v1(26.325,21.775) 26.7,21.4 26.7,19.25 ; v1(29.65,15.825) 29.65,14.725 v1@32.125,12.25 ; v1(32.825,26.75) 32.925,26.85 40.35,26.85 v1(40.4,26.9)
  other v1: 1.8,-1.5 13.7,-1.5 15.4,-1.5 17.1,-1.5 18.8,-1.5 20.5,-1.5 22.2,-1.5 23.9,-1.5 25.6,-1.5 27.3,-1.5 29,-1.5 34.1,-1.5 35.8,-1.5 37.5,-1.5 40.9,-1.5 42.6,-1.5 2.65,0.2 9.45,0.2 14.55,0.2 29.85,0.2 40.05,0.2 41.75,0.2 -1.6,1.9 1.8,1.9 3.5,1.9 42.6,1.9 -0.75,3.6 0.95,3.6 2.65,3.6 31.55,3.6 45.15,3.6 46.85,3.6 -1.6,5.3 -0.75,7 17.95,7 19.65,7 21.35,7 1.8,8.7 -0.75,10.4 0.95,10.4 2.65,10.4 -1.6,12.1 0.1,12.1 1.8,12.1 3.5,12.1 12,12.1 -0.75,13.8 0.95,13.8 2.65,13.8 14.55,13.8 -1.6,15.5 0.1,15.5 1.8,15.5 3.5,15.5 10.3,15.5 12,15.5 0.95,17.2 2.65,17.2 31.55,17.2 26.725,18.675 -1.6,18.9 6.9,18.9 12,18.9 18.8,18.9 20.5,18.9 19.65,20.6 40.05,20.6 41.75,20.6 43.45,20.6 45.15,20.6 46.85,20.6 -1.6,22.3 0.1,22.3 1.8,22.3 3.5,22.3 5.2,22.3 30.7,22.3 32.4,22.3 40.9,22.3 42.6,22.3 44.3,22.3 46,22.3 2.65,24 4.35,24 6.05,24 40.05,24 41.75,24 3.5,25.7 5.2,25.7 6.9,25.7 35.8,25.7 37.5,25.7 42.6,25.7
LED: DD1.11 R13.1 | length 7.7
  Top Layer w0.3: DD1.11@18.12,17.07 18.12,16.653 18.643,16.13 24.795,16.13 25.025,15.9 R13.1
LED_STLINK: R31.1 U4.30 | length 12.7
  Top Layer w0.3: U4.30 20,9.65 v1(20.3,9.95) ; v1(24.376,14.076) 24.8,14.076 24.925,14.201 R31.1@24.925,14.3
  Bottom Layer w0.3: v1(20.3,9.95) 21.665,11.315 22.802,11.315 24.376,12.89 v1(24.376,14.076)
LEDB: DD1.12 R12.1 | length 7.2
  Top Layer w0.3: DD1.12@18.62,17.07 18.65,17.04 18.65,16.787 18.837,16.6 24.275,16.6 25.025,17.35 R12.1
Net3V3_A: 3V3.A R11.2 | length 1.7
  Top Layer w0.8: 3V3.A 1.3,19.675 R11.2@2.975,19.675
NetBLINK_A: BLINK.A R13.2 | length 1.5
  Top Layer w0.8: R13.2 26.55,15.825 BLINK.A@28.05,15.825
NetCAN_A: CAN.A R12.2 | length 1.6
  Top Layer w0.8: R12.2 26.575,17.5 CAN.A@28.125,17.5
NetDD1_2: DD1.2 Y1.1 | length 3.4
  Top Layer w0.2: Y1.1 14.775,23.375 15.504,22.646 15.504,22.504 16.203,21.805 16.595,21.805 DD1.2@16.6,21.8
NetDD1_3: DD1.3 Y1.3 | length 2.7
  Top Layer w0.2: Y1.3 14.775,20.975 14.975,21.175 16.35,21.175 DD1.3@16.55,21.375
NetR21_1: R21.1 U4.44 | length 6
  Top Layer w0.3: R21.1 15.975,1.275 17.925,3.225 18.511,3.225 19.763,4.476 U4.44@19.763,5.275
NetR22_1: R22.1 U4.2 | length 7.8
  Top Layer w0.3: R22.1 20.642,1.275 20.842,1.475 20.842,2.457 24.245,5.86 24.245,6.841 23.944,7.142 U4.2@23.775,7.142
NetR23_1: R23.1 U4.3 | length 7.8
  Top Layer w0.3: R23.1 22.975,1.275 23.175,1.475 23.175,3.486 24.715,5.026 24.715,7.036 24.109,7.642 U4.3@23.775,7.642
NetR27_1: R27.1 TVS1.4 | length 2.5
  Top Layer w0.3: TVS1.4 7.326,2.848 8.449,1.725 8.575,1.725 8.75,1.55 R27.1@8.75,1.375
NetR28_1: R28.1 R29.1 TVS1.6 | length 4.1
  Top Layer w0.3: TVS1.6 8.55,3.85 R28.1@8.575,3.875 ; R29.1 8.75,4.1 R28.1@8.85,4
NetR30_2: R30.2 VUSB.A | length 1.4
  Top Layer w0.8: VUSB.A 3.05,6.075 R30.2@3.075,6.1
NetR31_2: "ST LINK.A" R31.2 | length 1.6
  Top Layer w0.8: R31.2 26.55,14.275 27.52,14.275 27.87,13.925 27.925,13.925
NetU4_5: U4.5 Y2.1 | length 10.5
  Top Layer w0.3: U4.5@23.375,8.612 23.479,8.612 23.974,8.612 24.387,8.199 24.387,8.086 25.275,7.198 25.275,0.975 25.95,0.3 Y2.1
NetU4_6: U4.6 Y2.3 | length 9
  Top Layer w0.3: U4.6@23.15,9.125 24.126,9.125 24.857,8.394 24.857,8.281 25.9,7.238 25.9,2.75 25.95,2.7 Y2.3
NRST: DD1.4 R7.2 | length 4.4
  Top Layer w0.2: R7.2 13.25,19.025 13.5,19.275 13.918,19.275 15.418,20.775 DD1.4 DD1.4@16.8,20.775
RX1/C1: DD1.22 U4.12 | length 9.9
  Top Layer w0.2: DD1.22@22.3,19.825 23.04,19.825 23.341,19.524 v1(23.476,19.524) ; v1(22.65,13.2) 23.025,12.825 U4.12
  Bottom Layer w0.2: v1(22.65,13.2) 22.72,13.27 22.72,14.393 24.3,15.973 24.3,18.7 v1(23.476,19.524)
RX2/B1: DD1.10
SCL/A2: DD1.33
SDA/A1: DD1.34
SPI1_MISO: DD1.31
SPI1_MOSI: DD1.32
SPI1_SCK: DD1.30
SPI1_SS: DD1.29
STLINK_RX: DD1.20 DD1.21 U4.13 | length 7.8
  Top Layer w0.3: DD1.20 22.435,18.755 23.239,18.755 23.291,18.702 23.427,18.702 v1@23.5,18.775 ; DD1.21 22.785,19.275 22.83,19.23 22.83,19.222 v1@23.252,18.8 ; v1(23.476,18.626) 23.476,18.701 v1@23.575,18.8
  Bottom Layer w0.3: v1(21.901,14.501) 21.901,14.18 23.476,15.755 v1(23.476,18.626)
STM_RST: C11.1 R24.1 U4.7 | length 7.4
  Top Layer w0.3: U4.7@23.75,9.612 24.304,9.612 25.327,8.589 25.327,8.475 26.573,7.23 26.573,6.602 27.375,5.8 C11.1 ; C11.1@27.413,5.763 27.413,4.138 R24.1
SWDIO: DD1.25 SWD1.3 | length 8.8
  Top Layer w0.17: DD1.25 23.814,21.275 24.119,20.97 24.239,20.85 25.373,20.85 v1(25.379,20.844)
  Bottom Layer w0.17: v1(25.379,20.844) 25.379,24.029 26.675,25.325 SWD1.3@26.675,25.95
SWDIO_IN: R18.2 U4.25 | length 25.6
  Top Layer w0.3: U4.25 17.049,12.15 17.115,12.216 19.751,12.216 20.167,11.8 v1(20.275,11.8) ; R18.2@36.125,9.025 36.125,9.374 v1(36.127,9.375)
  Bottom Layer w0.3: v1(20.275,11.8) 20.198,11.723 20.198,11.015 19.802,10.619 19.802,10.4 19.63,10.228 19.63,9.672 20.022,9.28 20.578,9.28 21.19,9.893 26.469,9.893 26.532,9.831 28.169,9.831 28.329,9.99 30.282,9.99 30.357,10.065 35.437,10.065 v1(36.127,9.375)
SWDIO_p: SWD2.3 U4.34 | length 15.5
  Top Layer w0.3: SWD2.3 7.02,-0.92 10.73,-0.92 12.049,0.399 12.226,0.399 13.545,1.717 13.545,4.483 13.235,4.792 13.235,7.036 13.887,7.688 U4.34@14.325,7.688
SWLK: DD1.28 SWD1.2 | length 9.4
  Top Layer w0.17: DD1.28 21.6,23.5 21.645,23.545 22.731,23.545 24.43,25.244 24.43,26.055 25.55,27.175 26.675,27.175 SWD1.2 28,25.85 SWD1.2@28,25.825
SWLK_p: SWD2.2 U4.37 | length 15.5
  Top Layer w0.3: SWD2.2 6.24,-1.39 11.102,-1.39 16.2,3.708 U4.37@16.2,5.35
T3CH1/ADC6: DD1.13
T3CH2/ADC7: DD1.14
T3CH3/ADC8: DD1.15
T3CH4/ADC9: DD1.16
T_JTCK: R16.2 U4.15 U4.26 | length 30.8
  Top Layer w0.3: U4.26 17.214,11.65 17.309,11.746 18.712,11.746 19.327,11.13 20.554,11.13 20.945,11.521 20.945,12.078 20.733,12.29 U4.15@20.733,12.7 ; U4.15@20.763,14.2 20.763,14.399 21.534,15.171 22.179,15.171 22.977,14.373 22.977,13.863 24.67,12.17 28.803,12.17 29.424,11.548 29.424,11.371 30.046,10.749 30.046,9.929 v1(32.45,7.525) ; v1(37.675,6.2) R16.2
  Bottom Layer w0.3: v1(32.45,7.525) 33.167,6.808 33.167,6.145 33.807,5.505 34.285,5.505 35.31,5.505 36.005,6.2 v1(37.675,6.2)
T_JTMS: R17.2 R18.1 U4.27 | length 24.2
  Top Layer w0.3: U4.27 14.933,11.142 17.909,11.142 v1(17.976,11.076) ; v1(35.027,7.65) v1@35.027,7.712
  Top Layer w0.8: R18.1 35.85,7.45 35.85,6.375 R17.2@35.95,6.275
  Bottom Layer w0.3: v1(17.976,11.076) 17.976,10.025 19.191,8.81 20.772,8.81 21.385,9.423 26.275,9.423 26.337,9.361 28.364,9.361 28.524,9.52 30.477,9.52 30.551,9.595 33.082,9.595 v1(35.027,7.65)
T_NRST: "TARGET SWD1.5" R19.1 | length 14.4
  Top Layer w0.3: R19.1@37.725,9.05 37.825,9.05 39.05,7.825 v1(39.125,7.825)
  Bottom Layer w0.3: v1(39.125,7.825) 40.415,7.825 42.61,10.02 42.61,14.653 44.162,16.205 45.4,16.205
T_NRST_OUT: R19.2 U4.18 | length 24.1
  Top Layer w0.3: U4.18 19.233,13.458 19.233,14.369 20.504,15.641 22.373,15.641 23.447,14.567 23.447,14.058 24.371,13.134 28.504,13.134 29.894,11.743 29.894,11.566 30.516,10.944 30.516,10.186 32.447,8.255 34.684,8.255 34.749,8.32 37.255,8.32 R19.2@37.775,7.8
T_SWCLK: "TARGET SWD1.2" "TARGET SWD.3" R16.1 | length 14.3
  Top Layer w0.3: 35.8,1.625 35.95,1.775 35.95,2.975 37.55,4.575 R16.1@37.8,4.575
  Top Layer w0.6: R16.1@37.85,4.6 37.956,4.494 37.956,3.744 v1(37.975,3.725)
  Bottom Layer w0.6: v1(37.975,3.725) 37.994,3.744 39.221,3.744 42.247,6.77 42.347,6.77 44.162,8.585 45.4,8.585
T_SWDIO: "TARGET SWD1.4" "TARGET SWD.2" R17.1 | length 19.3
  Top Layer w0.3: 34.55,1.625 34.55,2.175 35.5,3.125 35.5,4.45 35.7,4.65 R17.1 ; R17.1@35.8,4.6 v1(35.85,4.55)
  Bottom Layer w0.3: v1(35.85,4.55) 38.9,4.55 43.08,8.73 43.08,12.583 44.162,13.665 45.4,13.665
T_SWO: "TARGET SWD1.6" R20.1 | length 19.1
  Bottom Layer w0.3: v1(34.077,6.225) v1(34.077,6.225) 34.83,6.98 35.304,6.98 37.324,9 40.925,9 42.14,10.215 42.14,16.723 43.842,18.425 44.275,18.425
T_SWO_OUT: R20.2 U4.31 | length 21
  Top Layer w0.3: U4.31 21.275,9.15 21.275,9.134 21.605,8.804 v1(21.605,8.695) ; v1(33.075,4.625) 33.087,4.637 33.887,4.637 R20.2@33.925,4.675
  Bottom Layer w0.3: v1(21.605,8.695) 25.675,4.625 v1(33.075,4.625)
TX2/B2: DD1.7 DD1.9
USB_DM: R27.2 U4.32 | length 12
  Top Layer w0.3: R27.2 10.275,1.525 11.505,2.755 11.505,9.633 11.692,9.82 12.958,9.82 13.498,9.28 13.498,9.165 14.006,8.658 U4.32@14.175,8.658
USB_DP: R28.2 U4.33 | length 6.5
  Top Layer w0.3: v1(13.326,8.075) 13.402,8.152 13.602,8.152 13.625,8.175 U4.33@14.35,8.175
  Bottom Layer w0.3: v1(10.25,3.9) 11.53,5.18 11.53,5.753 12.845,7.068 12.845,7.487 13.326,7.967 v1(13.326,8.075)
VBUS: C1.1 C9.1 CAN1.1 CAN2.1 D3.A J1.A4 J1.A9 J1.B4 J1.B9 R30.1 TVS1.5 U1.3 U3.1 U3.3 | length 99.5
  Top Layer w0.3: v1(4.725,6.075) R30.1 5.025,6.275 5.025,6.725 6.618,8.318 7.34,8.318 8.545,9.522 8.545,10.118 7.936,10.727 7.936,10.791 7.328,11.4 5.605,11.4 J1.B4 ; J1.B9 5.615,13.87 6.995,13.87 J1.A4@7,13.875 ; v1(6,1.675) 6,1.783 6.164,1.947 6.164,3.122 6.384,3.342 TVS1.5@6.55,3.342 ; J1.A4@6.725,13.875 6.74,13.89 7.57,13.89 7.675,13.995
  Top Layer w0.6: 7.675,13.995 8.7,15.02 ; v1(8.475,7.7) 9.635,8.86 v1@9.635,10.7 ; U3.1 8.631,20.511 8.631,18.144 C9.1@8.65,18.125 ; 8.65,19.05 9.673,19.05 10.469,19.846 10.469,20.511 U3.3 ; C9.1 8.7,15.02 ; v1(9.575,10.7) v1@9.635,10.7 ; v1(29.2,23.5) CAN1.1 ; v1(31.9,13.975) 31.9,13.948 31.205,13.253 31.205,11.655 31.985,10.875 C1.1@32,10.875 ; v1(32.102,10.751) C1.1@32.149,10.751 ; C1.1@32.3,10.575 33,11.275 U1.3 ; v1(36.525,15.25) 37.415,16.14 D3.A@37.415,19.85 ; D3.A@37.45,19.85 37.775,19.85 38.55,20.625 CAN2.1 ; 8.7,15.02 8.7,14.16 9.635,13.225 v1@9.635,10.7
  Bottom Layer w0.3: v1(4.725,6.075) 4.725,4.458 6,3.183 v1(6,1.675)
  Bottom Layer w0.6: v1@4.725,6.1 4.727,6.1 5.397,5.43 6.665,5.43 7.59,6.355 7.59,6.815 v1(8.475,7.7) ; v1(9.575,10.7) 13.364,10.7 15.314,12.65 20.585,12.65 20.855,12.38 22.99,12.38 23.47,12.86 23.47,14.329 24.037,14.896 24.716,14.896 27.302,12.309 27.302,11.492 28.165,10.63 28.885,10.63 29.006,10.751 v1(32.102,10.751) ; v1(29.2,23.5) 33.95,23.5 v1(37.525,19.925) ; v1(31.9,13.975) 33.175,15.25 v1(36.525,15.25)
Vin: CAN3.1 CAN3.2 D3.C | length 14.1
  Top Layer w1: v1(33.135,19.81) D3.C ; CAN3.2@40.175,10.225 40.175,9.025 CAN3.1
  Bottom Layer w1: v1(33.135,19.81) 33.408,19.81 40.2,13.017 v1(40.2,10.225)
"WAKE UP": R25.1 R26.2 U4.10 | length 5.4
  Top Layer w0.3: U4.10 25.8,11.15 R26.2 ; R26.2@25.875,11.125 26.431,10.569 26.431,10.223 27.004,9.65 27.175,9.65 27.35,9.475 R25.1@27.35,9.35
pads on no net: J1. J1.A2 J1.A3 J1.A5 J1.A8 J1.A10 J1.A11 J1.B2 J1.B3 J1.B5 J1.B8 J1.B10 J1.B11 U1.P$9 U3.4 U4.4 U4.11 U4.14 U4.16 U4.17 U4.19 U4.21 U4.22 U4.28 U4.29 U4.38 U4.39 U4.40 U4.41 U4.42 U4.43 U4.45 U4.46

## Polygon pours and split planes (outlines as drawn)
GND on Top Layer "GND_L01_P020" (solid, pour order 20): -3.55,31.575 46.025,31.575 50.625,26.975 50.625,-1.275 45.9,-6 -1.525,-6 -6.975,-0.55 -6.925,-0.5 -6.925,27.725
GND on Top Layer "gnd TOP 2" (solid, pour order 12): 16.025,9.7 16.075,9.65 21.825,9.65 21.825,3.75 21.725,3.85 16.025,3.85
GND on Top Layer "gnd TOP" (solid, pour order 18): 17.725,23.25 21.5,23.25 21.5,19.5 17.725,19.5
GND on Bottom Layer "GND_L02_P019" (solid, pour order 19): -2.95,30.9 45.975,30.9 50.225,26.65 50.225,-2.075 46.075,-6.225 -0.075,-6.225 -5.575,-0.725 -5.575,27.5

## Silkscreen, mask and mechanical layers (free items; w line width, h text height)
Top Overlay:
  lines w0.2: 30,3.075 32.15,3.075 32.95,3.875 34.625,3.875 34.925,4.175 34.925,7.8 35.45,8.325 ; 30.075,1.525 31.2,1.525 33.2,3.525 35.05,3.525 35.625,4.1 ; 37.775,4.125 39.175,2.725 41.85,2.725 ; 38.45,8.75 39.1,8.1 39.1,7.625 ; 39.05,7.6 39.05,5.025 39.8,4.275 41.8,4.275 ; -2.4,-0.85 -0.675,-2.575 46,-2.575 47.55,-1.025 47.55,25.85 45.675,27.725 -0.925,27.725 -2.4,26.25 -2.4,-0.85
  text "GND / CAN_L / CAN_H / Vusb" at 46.175,22 h0.7 r90
  text "GND / SWCLK / SWDIO / 3V3" at 40.275,1.95 h0.7 r270
Bottom Overlay:
  lines w0.6: -2.425,10.75 0.9,10.75 1.75,11.6 1.8,11.6 ; -2.325,13.35 0.8,13.35 1.575,12.575 1.575,12.525 ; 1.575,12.6 26.95,12.6 31.675,17.325 31.675,27.05 32.45,26.275 32.45,24.75 ; 1.7,11.525 26.975,11.525 31.675,6.825 31.675,0.1 32.4,0.825 32.4,3.025 ; 28.875,11.575 30.65,11.575 ; 32.2,11.6 38.45,11.6 37.725,10.875 36.525,10.875
  text "3V3 /  /  / GND" at 29.85,26.2 h0.7 r90
  text "3V3 /  / SWCLK /  / GND /  / SWDIO /  / NRST /  / SWO" at 37.95,19.3 h0.7 r180
  text "ST-LINK PROGRAMMER /  / CAN SNIFFER V2" at 5.925,14.7 h1 r180
  text "USB" at -2.075,12.6 h0.8 r180
  text "3V3 /  /  / GND" at 3.225,-5.475 h0.7 r270
Top Solder:
  rectangle: 18.2,18.875 21.05,21.65
Mechanical 2:
  lines w0.2: -3.4,-1.45 -3.4,26.475 -1.45,28.425 46.4,28.425 48.475,26.35 48.475,-1.425 46.45,-3.45 -1.4,-3.45 -3.4,-1.45
  lines w0.254: 42.776,22.25 42.776,22.251

## Text inside footprints (layer, text, board x,y; h text height)
J1: Mechanical 13 "PCB EDGE" at -4.346,7.616 h0.8 r270